# EAGLE board joy (EAGLE 5.01)
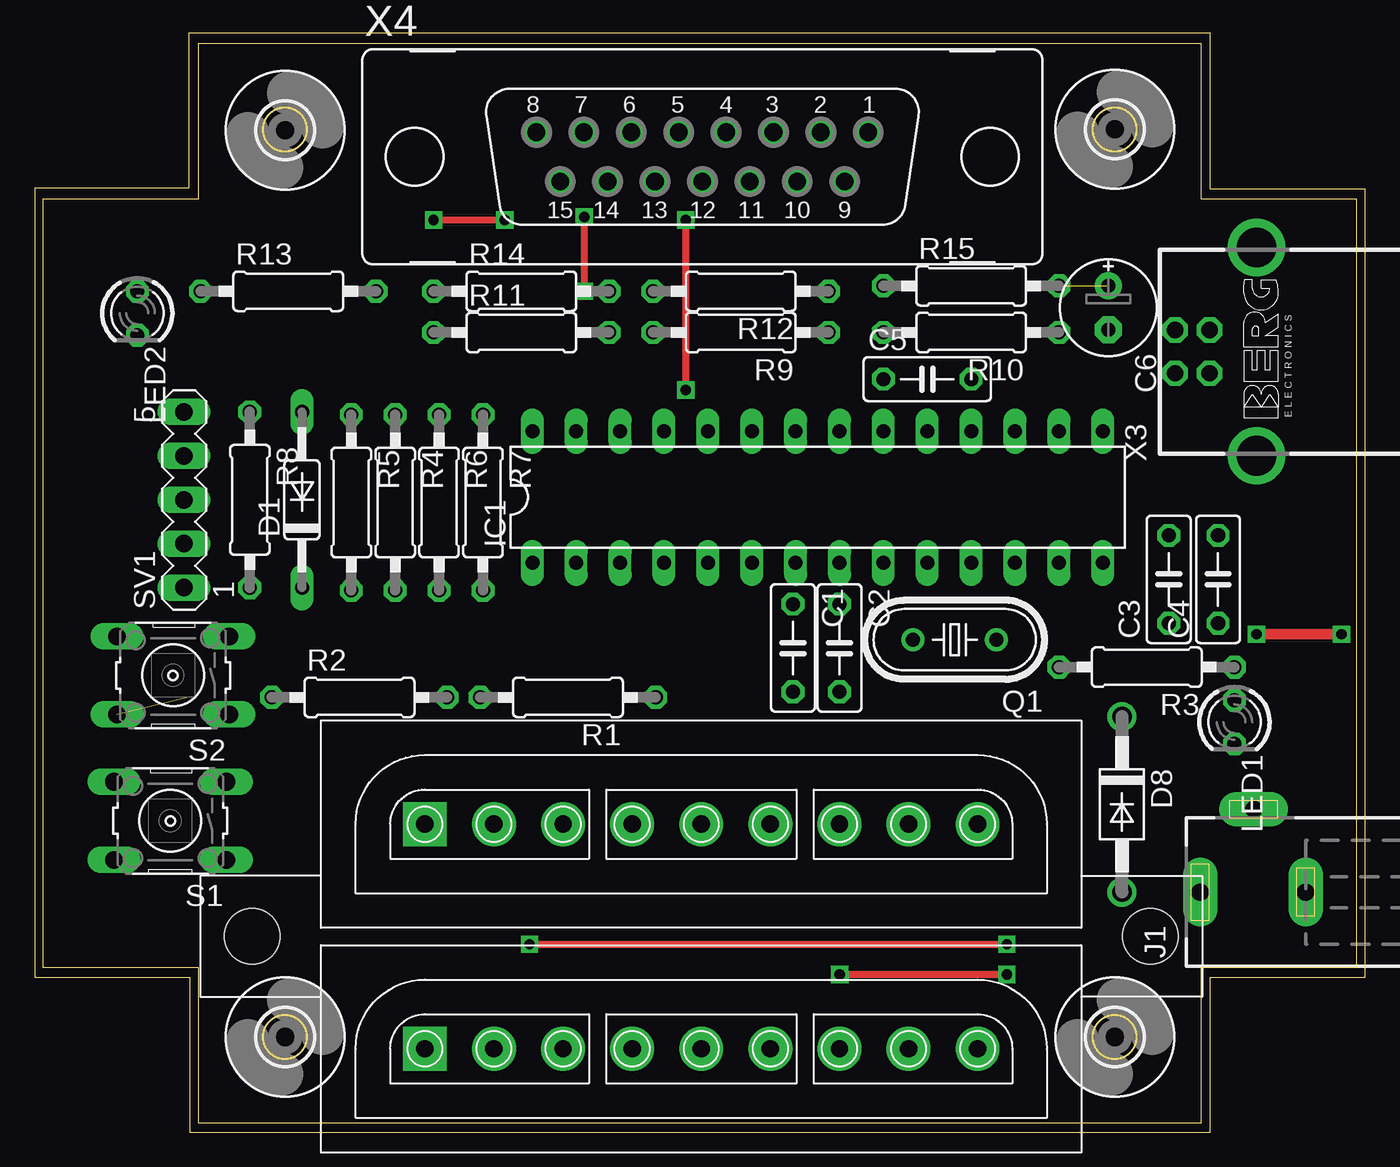
[diagram p0: board, top side]
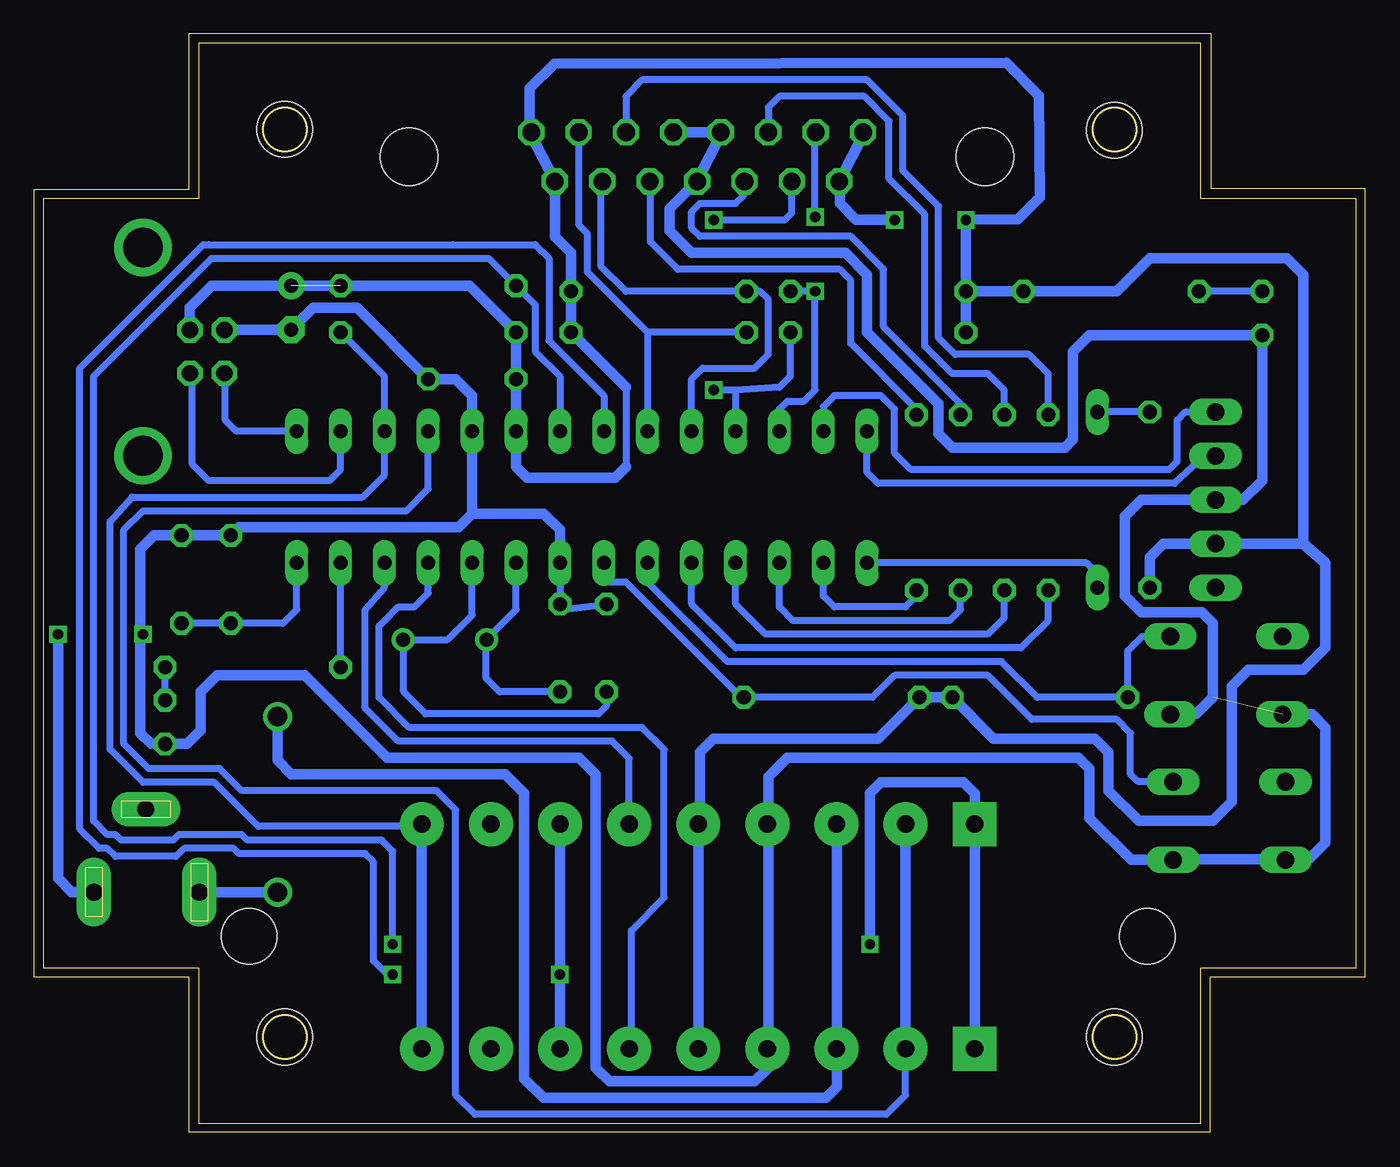
[diagram p1: board, bottom side, seen from below]

Size 76 x 62.5 mm. Coordinates in mm from the lower left corner, seen from the top.
Copper layers (1*16): Top 0.035mm / dielectric 1.5mm / Bottom 0.035mm
Design rules "default *": minimum track width 10mil, minimum drill 24mil, track to track 0.3mm, track to pad 0.3mm, pad to pad 0.3mm, via to via 0.3mm, smd to smd 0.3mm, copper to edge 40mil, drill to drill 8mil, minimum pad ring 10mil, minimum via ring 8mil, stop-mask expansion 4mil, vias tented up to drill 0mil, thermal gap 10mil
Milling: 12 lines

## Footprints (pad centres in the part's own frame; a part is rotated, then mirrored left to right if it is on the bottom)
C050-025X075 = drill 0.813 octagon: 1 -2.54,0; 2 2.54,0
E2,5-6E = drill 0.813 pad 1.575 round: + -1.27,0 | drill 0.813 pad 1.575 octagon: - 1.27,0
DO35-10 = drill 0.813 long: A 5.08,0; C -5.08,0
DO41-10 = drill 1.118 round: A 5.08,0; C -5.08,0
DIL28 = drill 0.813 long: 1 -16.51,-3.81; 2 -13.97,-3.81; 3 -11.43,-3.81; 4 -8.89,-3.81; 5 -6.35,-3.81; 6 -3.81,-3.81; 7 -1.27,-3.81; 8 1.27,-3.81; 9 3.81,-3.81; 10 6.35,-3.81; 11 8.89,-3.81; 12 11.43,-3.81; 13 13.97,-3.81; 14 16.51,-3.81; 15 16.51,3.81; 16 13.97,3.81; 17 11.43,3.81; 18 8.89,3.81; 19 6.35,3.81; 20 3.81,3.81; 21 1.27,3.81; 22 -1.27,3.81; 23 -3.81,3.81; 24 -6.35,3.81; 25 -8.89,3.81; 26 -11.43,3.81; 27 -13.97,3.81; 28 -16.51,3.81
DCJ0202 = drill 1 pad 2 long: 1 0,3.1; 2 4.8,0; 3 0,-3
LED3MM = drill 0.813 octagon: A -1.27,0; K 1.27,0
HC49U-V = drill 0.813 round: 1 -2.413,0; 2 2.413,0
0207/10 = drill 0.813 octagon: 1 -5.08,0; 2 5.08,0
B3F-10XX = drill 1.016 long: 1 -3.251,2.261; 2 3.251,2.261; 3 -3.251,-2.261; 4 3.251,-2.261
MA05-1 = drill 1.016 long: 1 -5.08,0; 2 -2.54,0; 3 0,0; 4 2.54,0; 5 5.08,0
PSX_FEMALE_COM = drill 1 pad 2.54 square: P1A 6,6; P1B 6,-7 | drill 1 pad 2.54 round: P2A 10,6; P2B 10,-7; P3A 14,6; P3B 14,-7; P4A 18,6; P4B 18,-7; P5A 22,6; P5B 22,-7; P6A 26,6; P6B 26,-7; P7A 30,6; P7B 30,-7; P8A 34,6; P8B 34,-7; P9A 38,6; P9B 38,-7 | hole 3.2: -4,-0.5; 48,-0.5
3,2 = hole 3.2: 0,0
PN61729-S = drill 0.95 octagon: 1 1.25,4.71; 2 -1.25,4.71; 3 -1.25,2.71; 4 1.25,2.71 | drill 2.3 pad 2.9 round: S1 -6.02,0; S2 6.02,0
F15V = drill 1.016 octagon: 1 9.601,1.422; 2 6.858,1.422; 3 4.115,1.422; 4 1.372,1.422; 5 -1.372,1.422; 6 -4.115,1.422; 7 -6.858,1.422; 8 -9.601,1.422; 9 8.23,-1.422; 10 5.486,-1.422; 11 2.743,-1.422; 12 0,-1.422; 13 -2.743,-1.422; 14 -5.486,-1.422; 15 -8.23,-1.422 | hole 3.302: 16.662,0; -16.662,0

## Placement (x,y rotation side)
C1  33pF  [C050-025X075]  43.39,27.51 270 top
C2  33pF  [C050-025X075]  46.09,27.51 270 top
C3  220nF  [C050-025X075]  65.14,31.48 90 top
C4  220nF  [C050-025X075]  68,31.48 90 top
C5  100nF  [C050-025X075]  51.17,43.07 0 top
C6  10uF  [E2,5-6E]  61.65,47.2 270 top
D1  1N4148  [DO35-10]  14.98,36.08 90 top
D8  1N4004  [DO41-10]  62.44,18.46 270 top
IC1  [DIL28]  44.82,36.24 0 top
J1  DCJ0202  [DCJ0202]  70.06,13.38 90 top
LED1  [LED3MM]  68.95,23.22 270 top
LED2  [LED3MM]  5.45,46.88 270 top
Q1  20MHz  [HC49U-V]  52.76,27.99 180 top
R1  1K  [0207/10]  30.37,24.65 180 top
R2  1K  [0207/10]  18.31,24.65 0 top
R3  1k  [0207/10]  63.87,26.4 180 top
R4  10k  [0207/10]  20.37,35.92 270 top
R5  10k  [0207/10]  17.83,35.92 270 top
R6  10k  [0207/10]  22.91,35.92 270 top
R7  10k  [0207/10]  25.45,35.92 270 top
R8  10K  [0207/10]  11.96,36.08 270 top
R9  1k  [0207/10]  40.38,45.77 180 top
R10  1k  [0207/10]  53.71,45.77 180 top
R11  1k  [0207/10]  27.68,45.77 0 top
R12  1k  [0207/10]  40.38,48.15 180 top
R13  1k  [0207/10]  14.18,48.15 0 top
R14  1k  [0207/10]  27.68,48.15 0 top
R15  1k  [0207/10]  53.71,48.47 0 top
S1  [B3F-10XX]  7.36,17.51 180 top
S2  [B3F-10XX]  7.51,25.92 180 top
SV1  ICSP  [MA05-1]  8.15,36.08 90 top
U$1  TEKO1122.9  [TEKO1122.9]  37.2,30.84 0 top
U$2  PSX_CON_FEMALE  [PSX_FEMALE_COM]  16.09,11.32 0 top
U$3  [3,2]  14,5 0 top
U$4  [3,2]  62.03,5 0 top
U$5  [3,2]  62.03,57.52 0 top
U$6  [3,2]  14,57.46 0 top
X3  PN61729-S  [PN61729-S]  70.22,44.66 90 top
X4  [F15V]  38.15,55.93 0 top

## Library data of the parts
C1-C6 R1-R15 = rcl
D1 D8 = diode
IC1 = pic18f2550
J1 = con-jack
LED1 LED2 = led
Q1 = crystal
S1 S2 = switch-omron
SV1 = con-lstb
U$1 U$2 = nuccio_lib
U$3-U$6 = holes
X3 = con-berg
X4 = con-subd

## Nets
+5V: C5.1 C6.+ IC1.20 R1.2 R2.2 R8.2 R9.1 R10.2 R11.1 R12.1 R13.2 R14.1 R15.2 SV1.2 U$2.P5A U$2.P5B X3.4 X4.1 X4.8 X4.9 X4.15
GND: C1.1 C2.1 C3.2 C4.2 C5.2 C6.- IC1.8 IC1.19 J1.3 LED1.K LED2.K S1.1 S1.2 S2.1 S2.2 SV1.3 U$2.P4A U$2.P4B X3.1 X4.4 X4.5 X4.12
N$1: D1.C IC1.1
N$2: IC1.15 X3.2
N$3: IC1.16 X3.3
N$4: C3.1 C4.1 IC1.14
N$5: IC1.28 SV1.4
N$6: IC1.27 SV1.5
N$7: R5.1 X4.3
N$8: R4.1 X4.6
N$9: IC1.2 R7.2
N$10: C2.2 IC1.9 Q1.2
N$11: IC1.3 R6.2
N$12: C1.2 IC1.10 Q1.1
N$13: R6.1 X4.13
N$14: R7.1 X4.11
N$15: IC1.4 R4.2
N$16: IC1.5 R5.2
N$17: IC1.26 R14.2 X4.7
N$18: IC1.25 R11.2 X4.14
N$19: IC1.24 R12.2 X4.10
N$20: IC1.23 R9.2 X4.2
N$21: IC1.6 R2.1 S2.3
N$22: IC1.7 R1.1 S1.3
N$23: IC1.22 U$2.P7A U$2.P7B
N$24: IC1.21 R15.1 U$2.P1A U$2.P1B
N$25: IC1.18 U$2.P2A U$2.P2B
N$26: IC1.17 R10.1 U$2.P9A U$2.P9B
N$27: IC1.11 U$2.P6B
N$28: IC1.12 U$2.P6A
N$29: LED1.A R3.1
N$30: IC1.13 R3.2
N$31: D8.A J1.1
N$32: D8.C U$2.P3A U$2.P3B
N$40: D1.A R8.1
N$92: LED2.A R13.1

## Tracks (layer width: path | path; a pad name or v marks a point on that pad's centre or on a via)
+5V  (via drill 0.6)  (1 unrouted)
  Top 0.406: v22.6,52.28 v26.72,52.28
  Bottom 0.406: R14.1 22.75,48.31 | 67.52,46.08 67.51,46.07 X3.4 | 42.28,42.59 42.28,37.99 | 47.84,57.36 47.76,57.36 X4.1 47.83,57.35 47.84,57.36 | R8.2 | SV1.2
  Bottom 0.61: R8.2 11.96,32.75 11.17,33.54 SV1.2 3.07,33.54 | R14.1 R11.1 | 47.84,57.36 47.84,59.9 46.41,61.32 20.26,61.38 18.36,59.47 18.31,53.6 19.58,52.33 v22.6,52.28 22.6,51.96 R14.1 | R14.1 R13.2 13.86,48.15 11.96,50.05 4.02,50.05 3.07,49.1 3.07,33.54 | 67.52,46.08 67.52,47.2 66.25,48.47 R15.2 51.33,48.47 R10.2 C5.1 IC1.20 48.63,37.99 48,37.35 42.92,37.35 42.28,37.99 | 42.28,42.59 R9.1 R12.1 45.46,50.37 46.38,51.3 X4.9 47.84,57.36 | 3.07,33.54 1.8,32.43 1.8,27.51 3.07,26.24 6.24,26.24 7.2,25.29 7.2,18.62 8.31,17.51 12.59,17.51 14.34,19.26 14.34,21.48 15.13,22.27 21.01,22.27 R2.2 R1.2 27.68,22.27 37.2,22.27 37.99,21.48 37.99,17.51 38.15,17.35 38.12,17.32 U$2.P5A 38.09,4.24 | v26.72,52.28 28.95,52.28 29.9,53.23 29.9,54.5 X4.15 28.47,57.36 X4.8 | 47.84,57.36 X4.1 | 38.09,4.24 U$2.P5B | 38.09,4.24 38.15,4.17
GND  (via drill 0.6)  (1 unrouted)
  Top 0.61: v70.22,28.3 v75.14,28.3
  Bottom 0.406: C3.2 | C3.2 | SV1.3 | SV1.3 6.56,36.08 | 10.69,23.7 10.73,23.66 S2.1 | C4.2 67.84,34.02 | 67.84,34.02 | C1.1 46.09,29.73 C2.1 IC1.8 | C5.2
  Bottom 0.61: 51.17,35.29 IC1.19 51.17,42.12 52.12,43.07 C5.2 57.84,47.2 60.38,47.2 C6.- | 51.17,35.29 51.96,34.5 64.66,34.5 C3.2 | C3.2 | LED2.K 5.45,37.19 6.56,36.08 | SV1.3 12.44,36.08 13.39,35.13 13.39,30.53 12.44,29.57 8.94,29.57 8.31,28.94 8.31,24.65 9.26,23.7 10.69,23.7 | 67.84,34.02 C3.2 | S2.2 2.55,23.66 1.8,22.91 1.8,16.24 2.75,15.29 4.02,15.29 | 4.02,15.29 10.53,15.29 10.57,15.25 S1.1 13.03,15.25 15.45,17.67 15.45,20.53 16.09,21.16 32.91,21.16 34.03,20.05 34.03,17.19 | S1.2 4.06,15.25 4.02,15.29 | C6.- | X3.1 65.3,45.93 C6.- | X4.4 39.58,57.36 X4.5 36.72,57.36 X4.12 39.74,52.92 39.74,51.64 38.47,50.37 29.58,50.37 28.31,49.1 28.31,45.77 24.18,41.64 24.18,39.89 23.39,39.1 16.88,39.1 16.4,39.58 16.4,44.66 15.45,45.61 LED2.K | LED2.K | LED2.K 5.29,45.61 | 51.17,35.29 47.04,35.29 46.09,34.34 IC1.8 | 34.03,17.19 34.09,17.25 U$2.P4A | 34.04,4.32 34.03,4.33 34.03,17.19 | 34.04,4.32 U$2.P4B | 34.04,4.32 34.04,3.21 34.82,2.43 43.23,2.43 44.03,3.22 44.03,20.21 44.98,21.16 56.09,21.16 60.85,25.92 65.93,25.92 66.89,24.97 66.89,22.75 67.68,21.95 68.79,21.95 LED1.K | C4.2 69.59,34.02 70.38,33.23 70.38,27.99 | LED1.K 69.74,21.95 70.38,22.59 70.38,27.99 | LED1.K | J1.3 74.35,13.38 75.14,14.18 v75.14,28.3 | 70.38,27.99 v70.22,28.3
N$1
  Bottom 0.406: D1.C 14.98,31.8 15.61,32.43 IC1.1
N$2
  Bottom 0.406: IC1.15 64.82,40.05 65.46,40.69 65.46,43.54 65.48,43.56 X3.2
N$3
  Bottom 0.406: IC1.16 58.79,37.83 59.43,37.19 66.41,37.19 67.36,38.15 67.36,43.23 67.68,43.54 67.66,43.56 X3.3
N$4
  Bottom 0.406: IC1.14 61.33,29.73 62.12,28.94 C3.1 | C3.1 | C4.1 68,29.1 67.84,28.94 C3.1
N$5
  Bottom 0.406: SV1.4 8.78,38.62 10.53,37.04 27.68,37.04 28.31,37.67 IC1.28
N$6
  Bottom 0.406: IC1.27 31.01,40.05 30.85,40.21 30.85,41.48 30.22,42.12 27.52,42.12 26.72,41.32 26.72,38.78 25.77,37.83 10.85,37.83 10.37,38.31 10.37,40.69 9.9,41.16 SV1.5
N$7
  Bottom 0.406: X4.3 42.27,57.5 42.28,57.51 42.28,59.42 41.33,60.37 28.31,60.37 26.25,58.31 26.25,55.13 24.18,53.07 24.18,45.45 23.23,44.5 18.94,44.5 17.83,43.39 R5.1 | R5.1
N$8
  Bottom 0.406: X4.6 34.03,57.36 34.03,58.78 33.39,59.42 28.47,59.42 27.04,57.99 27.04,54.66 24.98,52.59 24.98,44.97 24.02,44.02 | 24.02,44.02 23.39,43.39 21.33,43.39 20.37,42.43 R4.1 | 24.02,44.02
N$9
  Bottom 0.406: R7.2 25.45,30.53 26.09,29.89 30.22,29.89 30.85,30.53 IC1.2
N$10
  Bottom 0.406: 50.38,27.99 49.9,27.99 Q1.2 50.06,27.99 50.38,27.99 | IC1.9 48.63,29.73 50.38,27.99 | C2.2 49.58,24.97 50.38,25.76 50.38,27.99
N$11
  Bottom 0.406: R6.2 22.91,29.73 23.55,29.1 32.6,29.1 33.39,29.89 IC1.3
N$12
  Bottom 0.406: C1.2 43.39,24.18 43.87,23.7 53.87,23.7 55.14,24.97 55.14,27.99 54.98,27.99 Q1.1 54.82,27.99 52.6,27.99 51.17,29.42 IC1.10
N$13
  Bottom 0.406: R6.1 | R6.1 22.91,41.64 23.71,42.43 24.5,43.23 27.36,46.08 27.36,49.42 29.26,51.32 37.99,51.32 38.47,51.8 38.47,52.75 37.99,53.23 35.93,53.23 35.45,53.7 35.45,54.5 X4.13
N$14
  Bottom 0.406: X4.11 40.86,54.5 40.85,54.5 40.85,51.01 39.26,49.42 29.9,49.42 29.26,48.78 29.26,45.13 25.45,41.32 R7.1 | R7.1
N$15
  Bottom 0.406: R4.2 20.37,29.26 21.33,28.3 34.18,28.3 35.93,30.05 35.93,32.11 35.77,32.27 IC1.4
N$16
  Bottom 0.406: R5.2 17.83,30.37 17.83,29.1 19.42,27.51 35.93,27.51 38.47,30.05 38.47,31.96 38.31,32.11 38.47,32.27 IC1.5
N$17  (via drill 0.6)
  Top 0.406: v31.33,48.15 v31.33,52.43
  Bottom 0.406: v31.33,48.15 R14.2 | 31.33,47.99 v31.33,48.15 | 31.33,47.99 31.33,42.43 31.96,41.8 32.91,41.8 33.39,41.32 IC1.26 | X4.7 31.33,57.32 v31.33,52.43 | v31.33,48.15 | 31.33,47.99 v31.33,48.15
N$18  (via drill 0.6)
  Top 0.406: v37.2,42.43 v37.2,52.28
  Bottom 0.406: R11.2 32.76,43.23 33.39,42.59 35.93,42.43 | X4.14 32.67,52.68 33.07,52.28 v37.2,52.28 | 35.93,42.43 v37.2,42.43 | 35.93,42.43 IC1.25
N$19
  Bottom 0.406: X4.10 43.7,54.5 43.71,54.5 43.71,49.58 42.28,48.15 R12.2 34.5,48.15 34.03,47.67 34.03,44.5 34.82,43.7 37.84,43.7 38.47,43.07 IC1.24
N$20
  Bottom 0.406: 41.01,39.73 IC1.23 41.01,45.77 | R9.2 41.01,45.77 | 41.01,45.77 44.5,49.26 44.5,51.48 44.98,51.96 44.98,57.36 45,57.36 X4.2
N$21
  Bottom 0.406: 20.53,26.72 36.41,26.72 41.01,31.32 IC1.6 | S2.3 12.4,28.18 13.23,27.35 13.23,24.81 | 13.23,24.81 | R2.1 13.23,24.81 | R2.1 13.23,24.81 | 20.53,26.72 | R2.1 18.47,24.65 20.53,26.72
N$22
  Bottom 0.406: S1.3 12.63,19.77 13.07,20.21 13.07,22.59 13.86,23.38 18.79,23.38 21.33,25.92 26.72,25.92 27.99,24.65 R1.1 35.77,24.81 42.28,31.32 43.39,31.32 43.55,31.48 IC1.7
N$23  (via drill 0.6)
  Top 0.406: v46.09,8.62 v55.77,8.62
  Bottom 0.406: v55.77,8.62 56.09,8.62 56.89,9.41 56.89,15.13 57.36,15.6 64.66,15.6 64.98,15.92 67.84,15.92 68.32,15.45 71.81,15.45 72.28,15.92 72.76,15.92 73.87,17.03 73.87,43.7 66.73,50.85 66.41,50.85 52.28,50.85 47.52,50.85 46.73,50.05 46.73,45.29 43.55,42.12 IC1.22
  Bottom 0.61: U$2.P7B 45.95,4.32 45.93,4.33 46.09,4.49 v46.09,8.62 | v46.09,8.62 U$2.P7A | v46.09,8.62
N$24  (via drill 0.6)
  Top 0.406: v28.15,10.37 v55.77,10.37
  Bottom 0.406: IC1.21 46.09,43.23 47.52,44.66 47.52,47.35 R15.1 50.22,50.05 66.25,50.05 73.08,43.23 73.08,17.51 72.28,16.72 71.81,16.72 71.49,16.4 68.47,16.4 68.16,16.72 64.51,16.72 64.19,16.4 56.41,16.4 55.77,15.76 v55.77,10.37
  Bottom 0.61: U$2.P1A 22.12,17.35 | U$2.P1A | U$2.P1B U$2.P1A | U$2.P1A | U$2.P1A 22.09,19.06 22.75,19.73 27.52,19.73 28.15,19.1 v28.15,10.37 | v28.15,10.37
N$25
  Bottom 0.406: IC1.18 53.71,36.72 54.98,35.45 70.22,35.45 71.33,34.34 71.33,21.95 69.9,20.53 65.78,20.53 64.51,19.26 53.23,19.26 52.12,18.14 52.12,1.63 51.01,0.52 27.2,0.52 26.09,1.64 26.09,4.33
  Bottom 0.61: U$2.P2B 26.09,4.33 U$2.P2A
N$26
  Bottom 0.406: R10.1 56.25,43.23 56.25,42.12 IC1.17 56.25,37.51 57.52,36.24 70.86,36.24 72.13,34.81 72.13,21.64 70.22,19.73 66.09,19.73 63.55,17.19 54.19,17.19
  Bottom 0.61: U$2.P9A 54.09,17.29 54.19,17.19 54.09,17.09 U$2.P9B
N$27
  Bottom 0.406: IC1.11 53.71,31 53.71,30.69 54.5,29.89 55.46,29.89 56.25,29.1 56.57,28.78 56.57,24.65 54.82,22.91 41.33,22.91 40.06,21.64 40.06,13.06 41.96,11.16 41.96,4.49 42.12,4.33 42.11,4.32 U$2.P6B
N$28
  Bottom 0.406: IC1.12 56.25,31 57.36,29.73 57.36,24.02 55.46,22.11 43.07,22.11 42.09,21.13 U$2.P6A
N$29
  Bottom 0.406: R3.1 | LED1.A R3.1
N$30
  Bottom 0.406: R3.2 IC1.13
N$31
  Bottom 0.61: 67.05,13.38 J1.1 D8.A
N$32
  Bottom 0.61: 30.06,4.32 30.06,4.17 | 30.06,4.32 U$2.P3B 30.07,4.32 30.06,4.33 | U$2.P3A 30.06,17.32 30.06,4.33 | 30.06,4.33 30.06,4.32 | D8.C 62.44,21 61.65,20.21 49.27,20.21 48.15,19.1 48.15,2.59 47.04,1.48 30.69,1.48 30.06,2.11 30.06,4.33
N$40
  Bottom 0.406: R8.1 D1.A
N$92
  Bottom 0.406: R13.1 | R13.1 9.1,48.31 | LED2.A R13.1